# Altium PCB PCB_高考倒计时_第二版_低配版_2021-11-20.pcbdoc
Units mil, origin at the board's own origin, x right, y up, seen from the top; angles counter-clockwise.
Board outline 3844.65 x 2978.5 mil, 2 copper layers (Top Layer, Bottom Layer); 28 components, 21 nets, 116 pads, 5 vias.
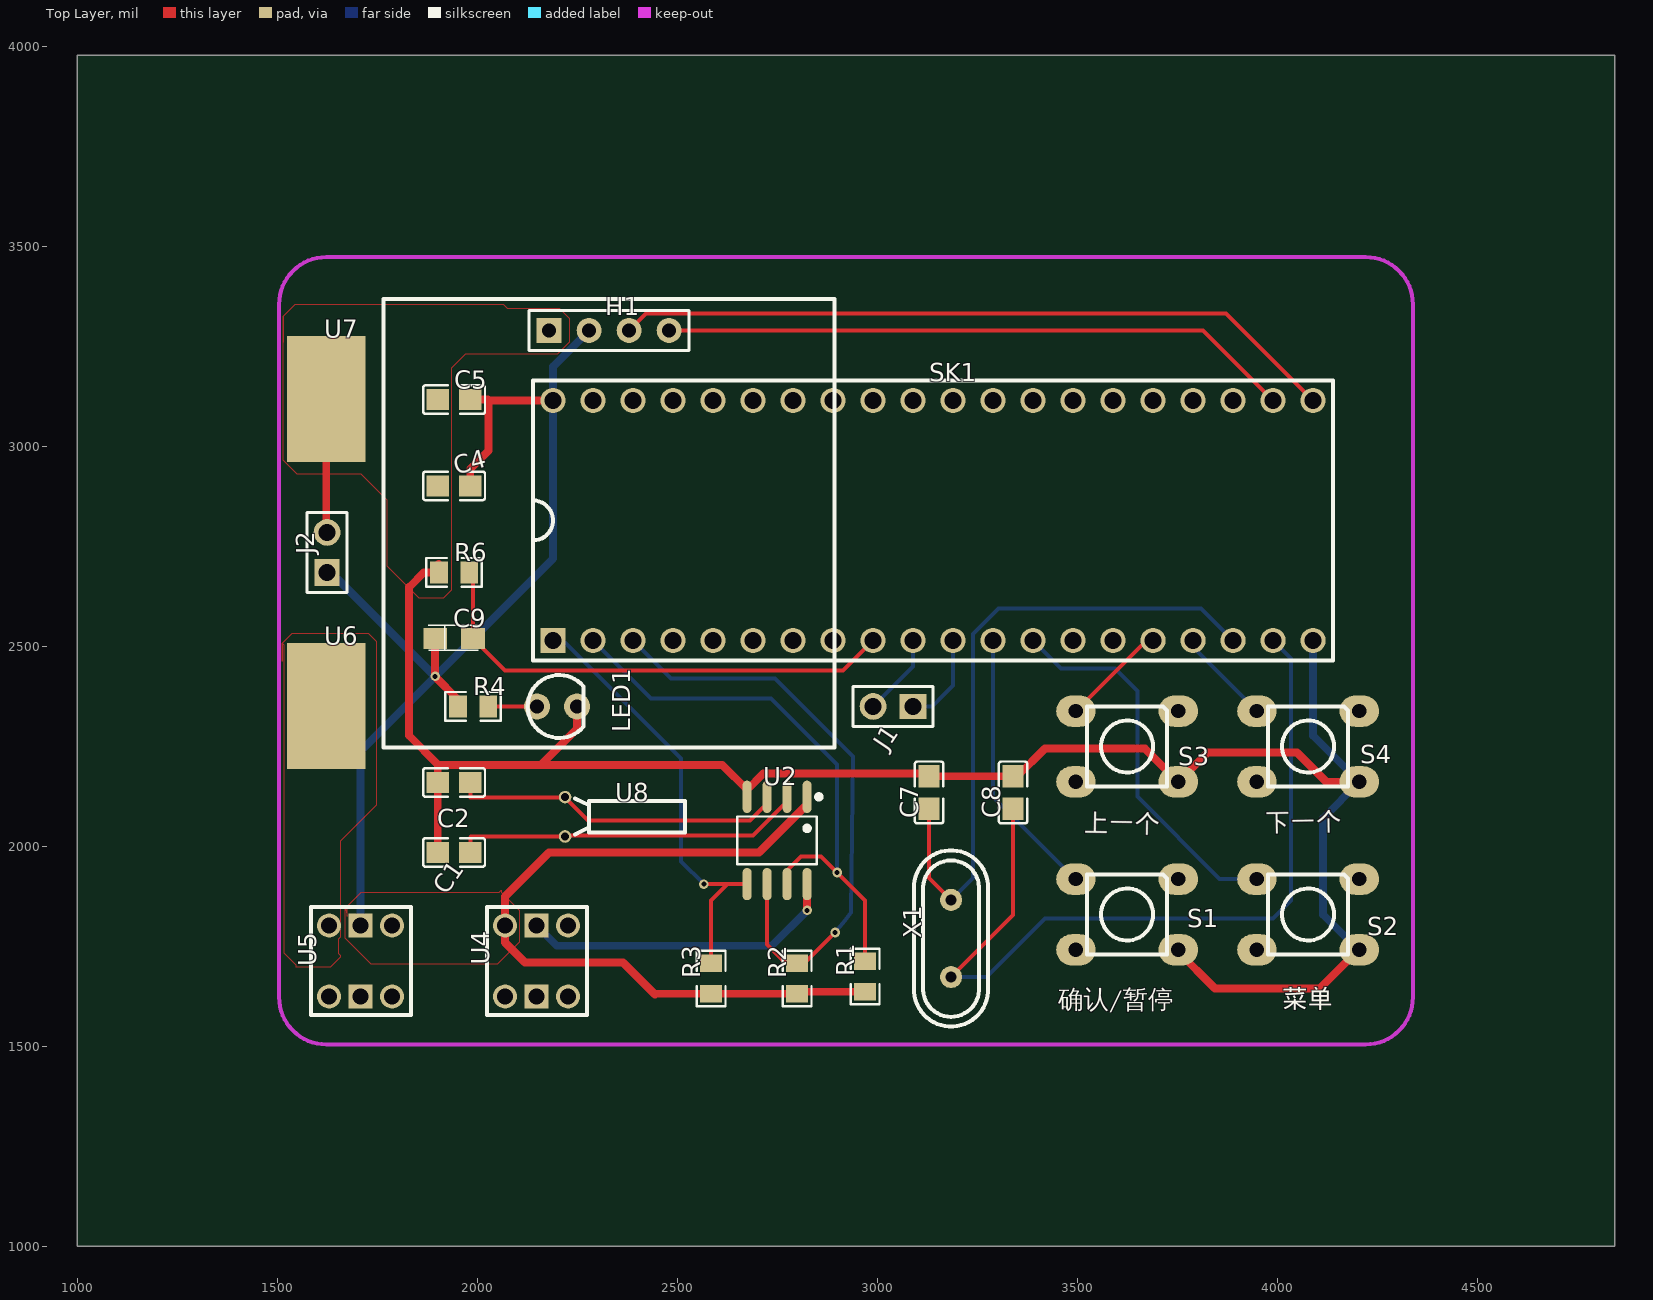
[diagram p0: Top Layer view]
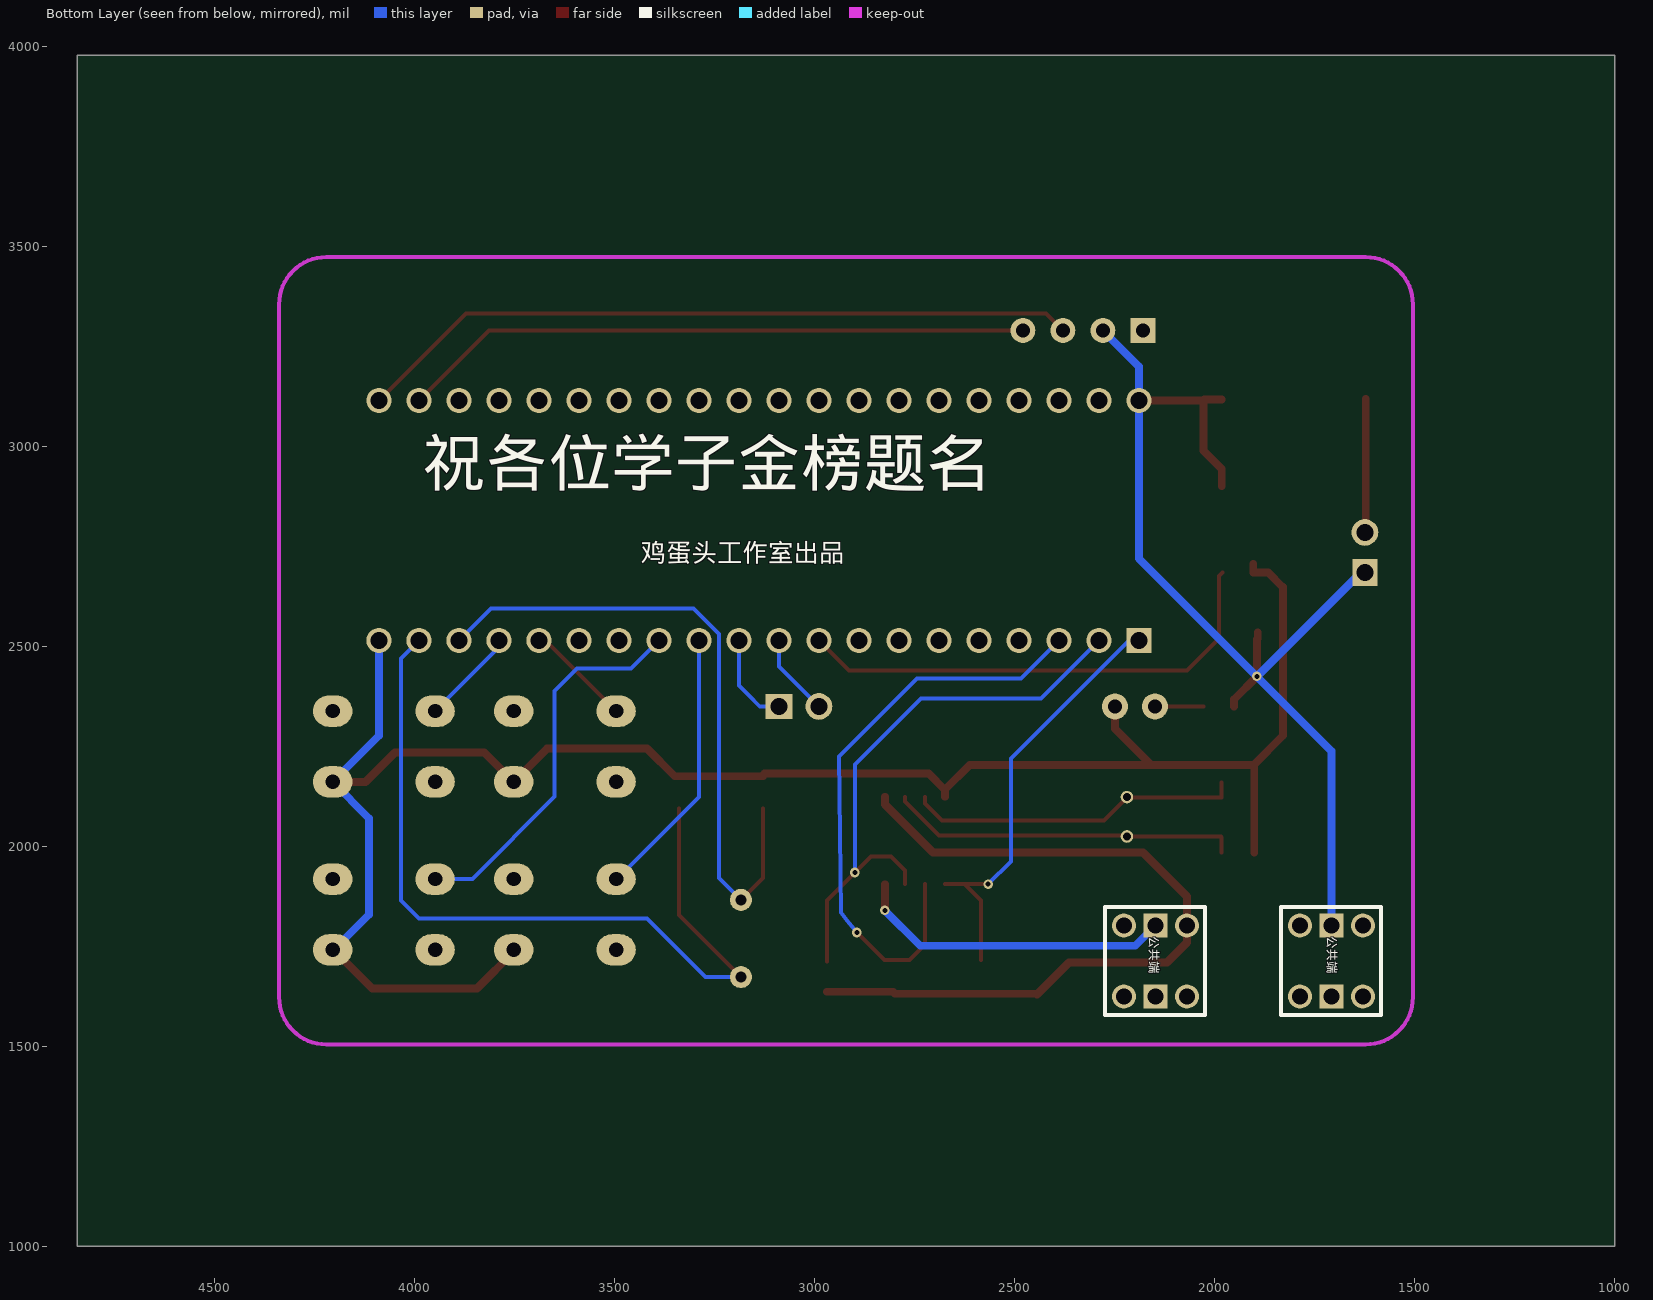
[diagram p1: Bottom Layer view, seen from below]

## Layer stack, top to bottom
Top Layer: signal copper (thickness not stored)
Dielectric: dielectric 12.6, FR-4, Dk 4.8
Bottom Layer: signal copper (thickness not stored)

## Board outline
4844.65,1000 1000,1000 1000,3978.5 4844.65,3978.5

## Components (designator, comment, footprint, x,y, rotation, side; value= is the part's Value field where it differs from the comment)
C1 "20p" C0805 1942.5,1985 r180 top
C2 "20p" C0805 1942.5,2160 r180 top
C4 "10uF" C0805 1942.5,2901.4 r0 top
C5 "104" C0805 1942.5,3117.2 r0 top
C7 "33p" C0805 3130,2135 r270 top
C8 "33p" C0805 3340,2135 r270 top
C9 "10uF" CASE-A_3216 1942.52,2520 r0 top
H1 "HDR-F-2.54_1x4" HDR-F-2.54_1X4 2330,3290 r0 top
J1 "HDR-M-2.54_1x2" HDR-M-2.54_1X2 3040,2350 r180 top
J2 "HDR-M-2.54_1x2" HDR-M-2.54_1X2 1625,2735 r90 top
LED1 "LED-TH-3mm_G" LED-TH_BD3.0_GREEN 2200,2350 r90 top
R1 "5.1k" R0805 2970,1675 r90 top
R2 "5.1k" R0805 2800,1670 r90 top
R3 "5.1k" R0805 2585,1670 r90 top
R4 "150" R0805 1990,2350 r0 top
R6 "10k" R0805 1942.5,2685 r0 top
S1 "按钮" 按钮 3625,1830 r0 top
S2 "按钮" 按钮 4077.52,1830 r0 top
S3 "按钮" 按钮 3625,2250 r0 top
S4 "按钮" 按钮 4077.5,2250 r0 top
SK1 "ICseat-40P" DIP-40_L50.8-W17.8-P2.54-LS15.2-BL 3140,2815 r0 top
U2 "DS1302ZN+T&R" SOIC-8_L4.9-W3.9-P1.27-LS6.0-BL 2750,2015 r180 top
U4 "6脚自锁按钮开关" 6脚自锁开关 2070,1625 r90 top
U5 "6脚自锁按钮开关" 6脚自锁开关 1630,1625 r90 top
U6 "5x8mm焊盘" 5X8MM焊盘 1623.11,2351.45 r0 top
U7 "5x8mm焊盘" 5X8MM焊盘 1623.11,3119.17 r0 top
U8 "32.786HZ晶振_宽焊盘" 32.786HZ晶振_宽焊盘 2220,2075 r180 top
X1 "32.768HZ" OSC-TH_L11.1-W4.7-P4.88 3185,1770 r90 top

## Footprints (in the part's own frame and the unit in brackets; to place one, negate y for a bottom-side part, rotate by r counter-clockwise, add the part's x,y. Pads: shape width x height; smd on the part's side, far side on the other; paste and mask are expansions set on the pad)
5X8MM焊盘 [mm]
  rect 5x8 smd: 1(0,0)
6脚自锁开关 [mm]
  round 1.524 hole 1: 1(0,0) 2(4.5,0) 5(0,-4) 6(4.5,-4)
  rect 1.524x1.524 hole 1: 3(0,-2) 4(4.5,-2)
  silkscreen extent -1.18,-5.21 5.68,1.14
32.786HZ晶振_宽焊盘 [mm]
  round 0.8 hole 0.5: 1(0,1.27) 2(0,-1.23)
  silkscreen extent -7.62,-1.14 -0.63,1.14
C0805 [mm]
  rect 1.41x1.35 smd: 1(-1.03,0) 2(1.03,0)
  silkscreen extent -1.96,-0.9 1.96,0.9
CASE-A_3216 [mil]
  rect 59.05x53.5 smd: 1(-47.24,0) 2(47.25,0)
  silkscreen extent -65,-30 61,33
DIP-40_L50.8-W17.8-P2.54-LS15.2-BL [mm]
  rect 1.6x1.6 hole 1.1: 1(-24.13,-7.62)
  round 1.6 hole 1.1: 2(-21.59,-7.62) 3(-19.05,-7.62) 4(-16.51,-7.62) 5(-13.97,-7.62) 6(-11.43,-7.62) 7(-8.89,-7.62) 8(-6.35,-7.62) 9(-3.81,-7.62) 10(-1.27,-7.62) 11(1.27,-7.62) 12(3.81,-7.62) 13(6.35,-7.62) 14(8.89,-7.62) 15(11.43,-7.62) 16(13.97,-7.62) 17(16.51,-7.62) 18(19.05,-7.62) 19(21.59,-7.62) 20(24.13,-7.62) 21(24.125,7.62) 22(21.586,7.62) 23(19.045,7.62) 24(16.505,7.62) 25(13.965,7.62) 26(11.425,7.62) 27(8.885,7.62) 28(6.345,7.62) 29(3.81,7.62) 30(1.27,7.62) 31(-1.27,7.62) 32(-3.81,7.62) 33(-6.35,7.62) 34(-8.89,7.62) 35(-11.43,7.62) 36(-13.97,7.62) 37(-16.51,7.62) 38(-19.05,7.62) 39(-21.59,7.62) 40(-24.13,7.62)
  silkscreen extent -25.4,-8.89 25.4,8.89
HDR-F-2.54_1X4 [mil]
  rect 62x62 hole 35: 1(-150,0)
  round 62 hole 35: 2(-50,0) 3(50,0) 4(150,0)
  silkscreen extent -200,-50 200,50
HDR-M-2.54_1X2 [mm]
  rect 1.7x1.575 hole 1.1: 1(-1.27,0)
  round 1.7 hole 1.1: 2(1.27,0)
  silkscreen extent -2.54,-1.27 2.54,1.27
LED-TH_BD3.0_GREEN [mil]
  round 65 hole 35.43: 1(0,50) 2(0,-50)
  silkscreen extent -79,-66 79,73
OSC-TH_L11.1-W4.7-P4.88 [mm]
  round 1.4 hole 0.7: 1(-2.45,0) 2(2.45,0)
  silkscreen extent -5.59,-2.35 5.6,2.35
R0805 [mil]
  rect 44.59x54.21 smd: 1(-38.04,0) 2(38.04,0)
  silkscreen extent -69,-36 69,36
SOIC-8_L4.9-W3.9-P1.27-LS6.0-BL [mm]
  oval 0.588x2.045 smd: 1(-1.905,-2.773) 2(-0.635,-2.773) 3(0.635,-2.773) 4(1.905,-2.773) 5(1.905,2.773) 6(0.635,2.773) 7(-0.635,2.773) 8(-1.905,2.773)
  silkscreen extent -2.8,-2.92 2.53,1.52
按钮 [mil]
  oval 98.42x78.74 hole 36: 1(-128,-88.6) 2(-128,88.6) 3(128,88.6) 4(128,-88.6)
  silkscreen extent -100,-100 100,100

## Via types
v1: diameter 24.02, hole 12.01, Top Layer to Bottom Layer, 3 vias
v2: diameter 23.62, hole 11.97, Top Layer to Bottom Layer, 2 vias

## Nets (pads, with @x,y where several pads share a name; then routed paths per layer and width w, separated by ;. In a path a pad name is that pad's centre, name@x,y a point inside that pad or via, vN(x,y) a via of type N, cw(c..) or ccw(c..) an arc to the next point about the centre after c; other vN are vias at no path point)
GND: C1.2 C2.2 C4.1 C5.1 C7.1 C8.1 H1.1 J2.2 LED1.2 R6.1 S1.4 S2.4 S3.4 S4.4 SK1.20 U2.4 U7.1 | length 5248.1
  Top Layer w19.29: C1.2 C2.2 1901.95,2181.11 1901.95,2202.22 1903.45,2203.72 2612.95,2203.72 U2.4@2675,2141.67 ; 1903.4,2203.7 1830,2277.2 1830,2648.5 1866.5,2685 R6.1 R6.1@1904.46,2706.38 ; U2.4 U2.4@2675,2141.67 ; C8.1 C7.1 3132.78,2175.55 3125.9,2182.44 2715.77,2182.44 U2.4@2675,2141.67
  Top Layer w19.68: U7.1 1623.11,2786.89 J2.2 ; 2159.29,2203.72 2250,2294.44 LED1.2 ; C8.1 3350.55,2175.55 3420,2245 3669.4,2245 S3.4 3826.6,2235 4050,2235 4123.6,2161.4 S4.4 ; S1.4@3750.5,1741.4 3750.5,1739.5 3845,1645 4106.6,1645 S2.4@4203,1741.4
  Bottom Layer w19.29: SK1.20 4090,2276.9 S4.4 4115,2070.9 4115,1829.4 S2.4@4203,1741.4
I2C_SCL: H1.3 SK1.21 | length 1817.2
  Top Layer w10: H1.3 2422.2,3332.2 3872.6,3332.2 SK1.21
I2C_SDA: H1.4 SK1.22 | length 1582.3
  Top Layer w10: H1.4 3814.86,3290 SK1.22
KEY_1: S1.2 SK1.12 | length 681.1
  Bottom Layer w10: SK1.12 3290,2123.1 S1.2@3494.5,1918.6
KEY_2: S2.2 SK1.13 | length 959.2
  Bottom Layer w10: SK1.13 3460,2445 3595,2445 3650.8,2389.2 3650.8,2289.2 3650.8,2124.4 3856.6,1918.6 S2.2@3947,1918.6
KEY_3: S3.2 SK1.16 | length 266.1
  Top Layer w10: S3.2 3673.4,2515 SK1.16
KEY_4: S4.2 SK1.17 | length 242.5
  Bottom Layer w10: SK1.17 3790,2498.1 S4.2
LED1_1: LED1.1 R4.2 | length 122
  Top Layer w10: R4.2 LED1.1
RST: C9.2 R6.2 SK1.9 | length 1233.3
  Top Layer w10: R6.2 1989.76,2675.78 C9.2 2069.76,2440 2915,2440 SK1.9
RXD: J1.2 SK1.10 | length 206.4
  Bottom Layer w10: J1.2 3090,2450 SK1.10
SK1_18: C7.2 SK1.18 X1.2 | length 1647.9
  Top Layer w10: C7.2 3130,1921.45 X1.2
  Bottom Layer w10: X1.2 3240,1921.45 3240,2531.3 3303.7,2595 3810,2595 SK1.18
SK1_19: C8.2 SK1.19 X1.1 | length 2083.1
  Top Layer w10: X1.1 3340,1828.55 C8.2
  Bottom Layer w10: X1.1@3185,1673.5 3273.5,1673.5 3420,1820 3990,1820 4035,1865 4035,2470 SK1.19
T_CE: R3.2 SK1.1 U2.5 | length 1094.3
  Top Layer w10: v1(2567,1905.85) 2625.85,1905.85 ; R3.2@2585,1716.49 2585,1865 2625.85,1905.85 ; U2.5 2625.85,1905.85
  Bottom Layer w10: SK1.1 2215,2515 2510,2220 2510,1962.9 v1(2567,1905.85)
T_IO: R2.2 SK1.3 U2.6 | length 1489.3
  Top Layer w10: U2.6 2725,1755 2763.5,1716.5 2800,1716.5 2826.49,1716.49 v1(2895,1785)
  Bottom Layer w10: SK1.3 2485,2420 2745,2420 2940,2225 2935,1835 2920,1815 v1(2895,1785)
T_SCLK: R1.2 SK1.2 U2.7 | length 1449.6
  Top Layer w10: U2.7 2775,1940 2810,1975 2860,1975 v1(2900,1935) 2970,1865 R1.2
  Bottom Layer w10: SK1.2 2435,2370 2735,2370 2900,2205 v1(2900,1935)
TXD: J1.1 SK1.11 | length 234.5
  Bottom Layer w10: J1.1 3137.93,2350 3165,2377.07 3190,2402.07 SK1.11
U6_1: U5.2 U6.1
U8_1: C1.1 U2.2 U8.1 | length 878.8
  Top Layer w10: C1.1@1983.05,1985 1983.05,2022.65 1985.4,2025 U8.1 2221.97,2026.97 2690.1,2026.97 2775,2111.87 U2.2
U8_2: C2.1 U2.3 U8.2 | length 839
  Top Layer w10: C2.1@1983.05,2160 1983.05,2122.36 2220,2122.36 U8.2 ; U8.2@2220,2122.4 2277.4,2065 2682.9,2065 2725,2107.1 U2.3
VCC: C4.2 C5.2 C9.1 H1.2 J2.1 R1.1 R2.1 R3.1 R4.1 SK1.40 U2.1 U4.2 U5.4 | length 4701
  Top Layer w19.29: C9.1@1892.76,2535 1892.76,2520 1895,2517.76 v2(1895,2425) ; C4.2@1983.05,2901.37 1983.05,2943.58 2028.66,2989.19 2028.66,3115 ; C5.2@1983.05,3117.21 2026.45,3117.21 2028.66,3115 ; U4.2@2064.47,1807.7 U4.2 ; SK1.40 2028.66,3115
  Top Layer w19.68: v2(1895,2425) 1951.96,2368.04 R4.1 ; U4.2 2070,1760 2120,1710 2365,1710 2445,1630 2446.96,1631.96 R3.1 R2.1 2805,1636.96 R1.1 ; U4.2 2070,1875 2180,1985 2705,1985 2825,2105 U2.1
  Bottom Layer w19.29: U5.4 1708.74,2238.74 v2(1895,2425) 2190,2720 SK1.40 2190,3200 H1.2
  Bottom Layer w19.68: J2.1 1635,2685 v2(1895,2425)
VCC_0: U2.8 U4.4 | length 799.7
  Top Layer w19.29: v2(2825,1840) U2.8@2825,1905.85
  Bottom Layer w19.29: U4.4 2199.38,1751.53 2736.53,1751.53 v2(2825,1840)
pads on no net: S1.1 S1.3 S2.1 S2.3 S3.1 S3.3 S4.1 S4.3 SK1.4 SK1.5 SK1.6 SK1.7 SK1.8 SK1.14 SK1.15 SK1.23 SK1.24 SK1.25 SK1.26 SK1.27 SK1.28 SK1.29 SK1.30 SK1.31 SK1.32 SK1.33 SK1.34 SK1.35 SK1.36 SK1.37 SK1.38 SK1.39 U4.1 U4.3 U4.5 U4.6 U5.1 U5.3 U5.5 U5.6

## Polygon pours and split planes (outlines as drawn)
U6_1 on Top Layer (solid): 1512.5,2462.5 1512.5,2507.5 1537.5,2532.5 1727.5,2532.5 1747.5,2512.5 1747.5,2102.5 1657.5,2012.5 1657.5,1772.5 1652.5,1767.5 1652.5,1732.5 1657.5,1727.5 1657.5,1722.5 1632.5,1697.5 1547.5,1697.5 1547.5,1702.5 1517.5,1732.5 1517.5,2502.5 1512.5,2507.5
VCC on Top Layer (solid): 1675,1825 1675,1850 1710,1885 2055,1885 2060,1890 2060,1885 2105,1840 2105,1760 2050,1705 1735,1705 1670,1770 1670,1845
GND on Top Layer (solid): 1515,3260 1515,3325 1545,3355 2065,3355 2075,3345 2205,3345 2230,3320 2230,3260 2200,3230 1970,3230 1935,3195 1935,2825 1935,2640 1915,2620 1855,2620 1775,2700 1775,2865 1710,2930 1550,2930 1515,2965 1515,3325

## Keep-outs
Keep-Out Layer:
  lines w10: 1505,1623.11 ccw(c1623.11,1623.11) 1623.11,1505 ; 1505,3355.39 cw(c1623.11,3355.39) 1623.11,3473.5 ; 4221.53,1505 ccw(c4221.54,1623.11) 4339.65,1623.11 ; 4221.53,3473.5 cw(c4221.54,3355.39) 4339.65,3355.39

## Silkscreen, mask and mechanical layers (free items; w line width, h text height)
Top Overlay:
  lines w10: 1766.22,2247.09 2893.78,2247.09 2893.78,3368.74 1766.22,3368.74 1766.22,2247.09
  text "上一个" at 3515,2020 h80 r359
  text "下一个" at 3970,2020 h80 r1
  text "菜单" at 4012.55,1580.3 h80
  text "确认/暂停" at 3452.9,1578.7 h80
Bottom Overlay:
  text "祝各位学子金榜题名" at 3980,2865 h196.85
  text "鸡蛋头工作室出品" at 3435,2695 h80

## Text inside footprints (layer, text, board x,y; h text height)
U4: Bottom Overlay "公共端" at 2170,1775 h39.37 r90
U5: Bottom Overlay "公共端" at 1725,1775 h39.37 r90